# Altium PCB 800U-R3N3-Test.PcbDoc
Units mm, origin at the board's own origin, x right, y up, seen from the top; angles counter-clockwise.
Board outline 152.4 x 101.6 mm, 2 copper layers (Top Layer, Bottom Layer); 98 components, 74 nets, 255 pads, 67 vias.
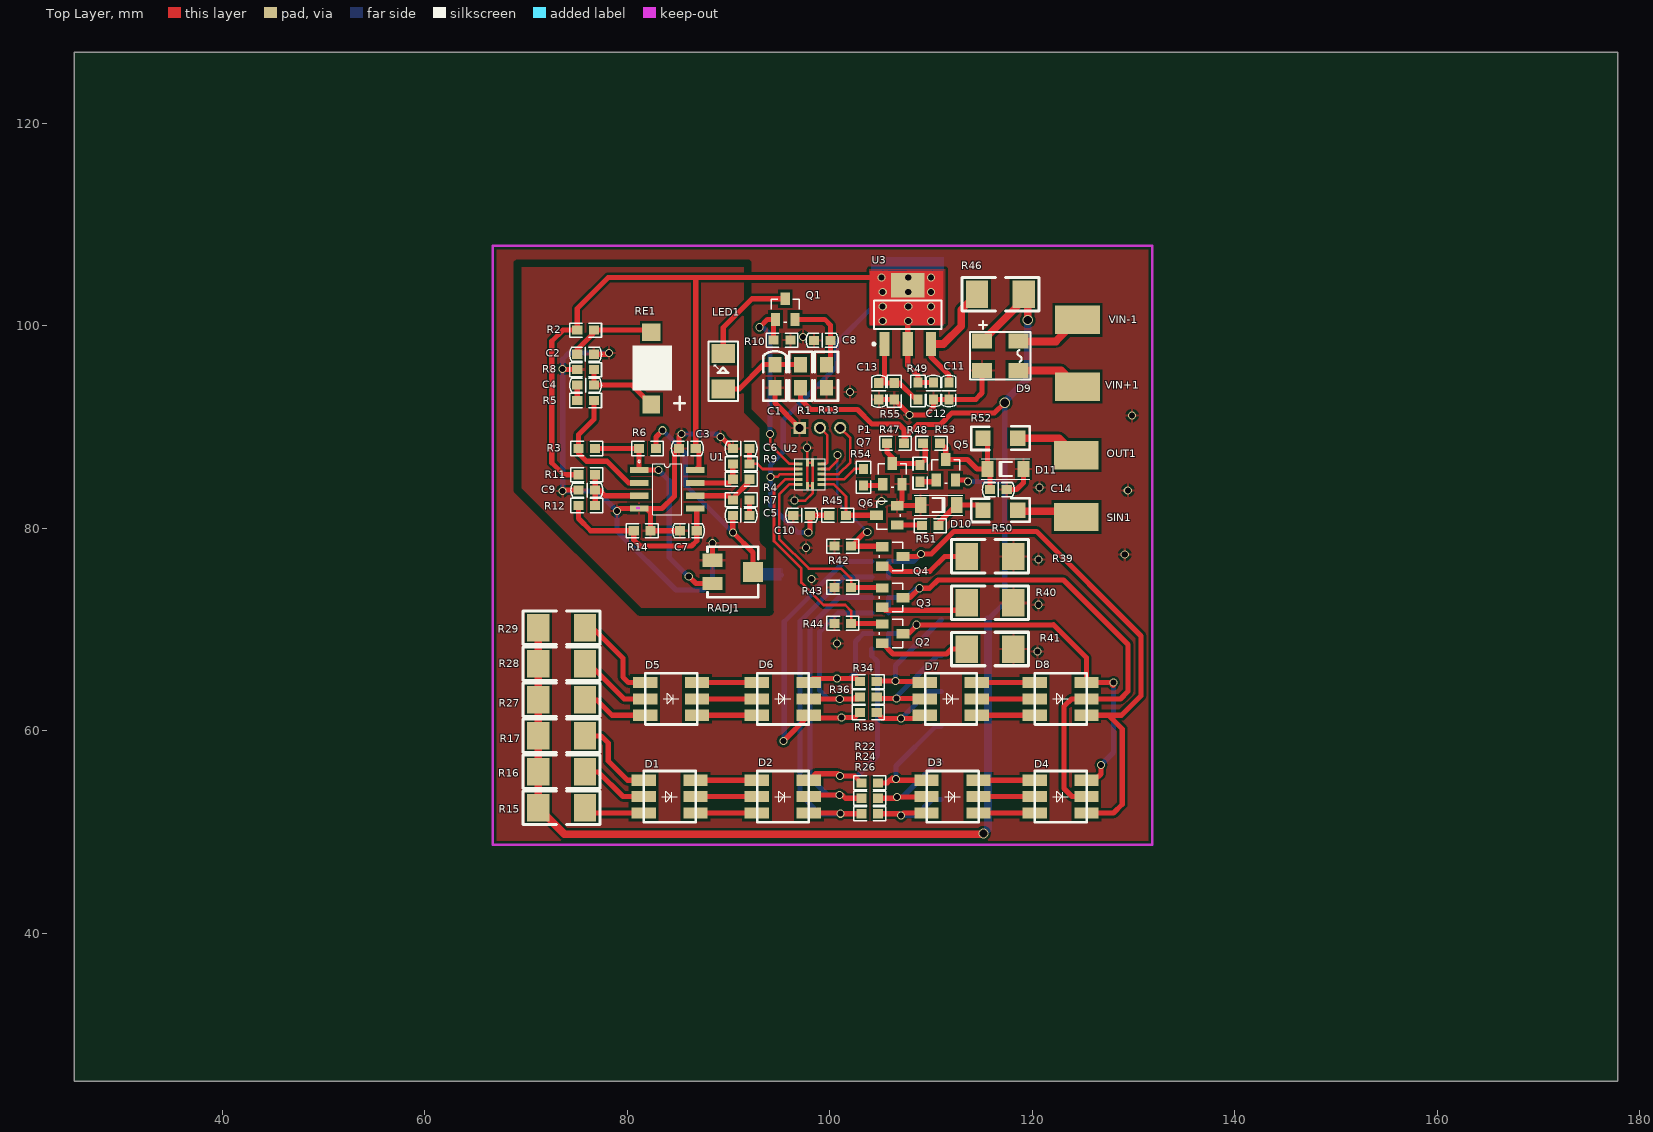
[diagram p0: Top Layer view]
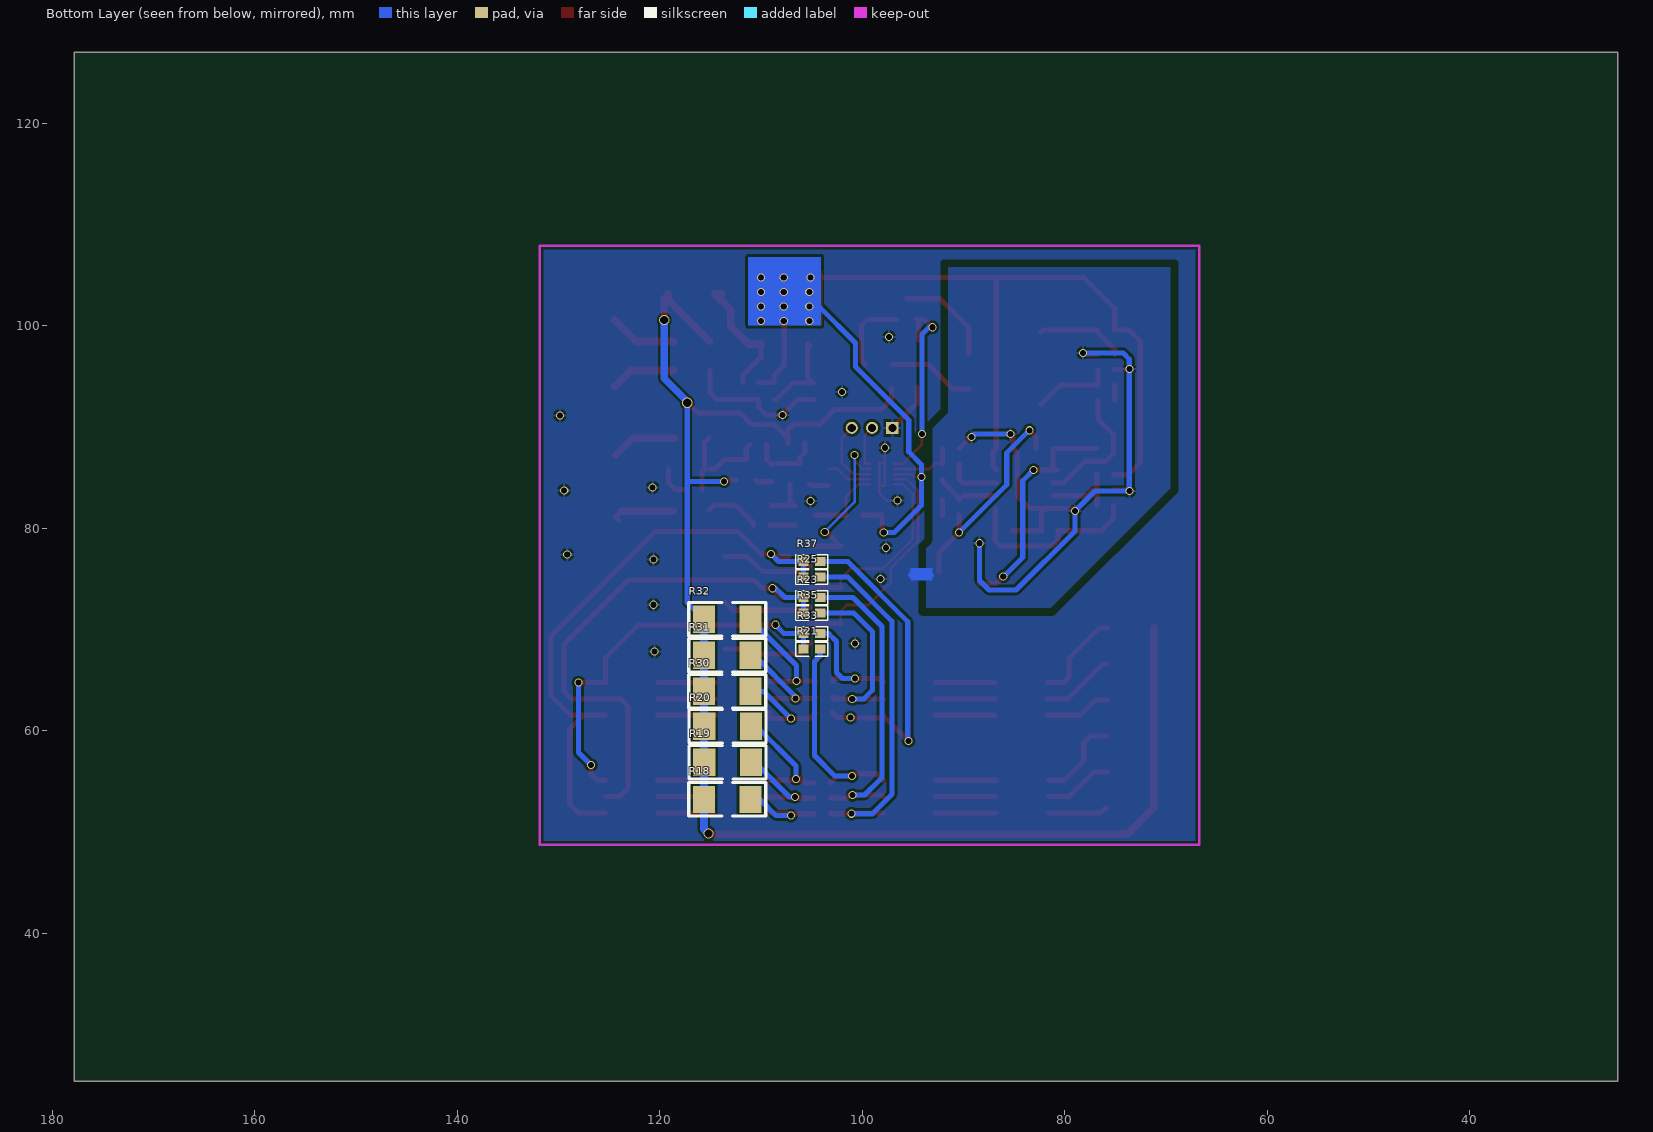
[diagram p1: Bottom Layer view, seen from below]

## Layer stack, top to bottom
Top Layer: signal copper 0.0356
Dielectric: dielectric 0.32, FR-4, Dk 4.8
Bottom Layer: signal copper 0.0356

## Board outline
25.4,25.4 177.8,25.4 177.8,127 25.4,127

## Design rules (kind name [scope] priority, off if disabled: settings)
Clearance [All] p1: gap=0.254
PolygonConnect [All] p1: connectstyle=Relief reliefconductorwidth=0.254 reliefentries=4 polygonreliefangle="90 Angle"
RoutingVias [All] p1: holewidth=0.711 width=1.27 viastyle="Through Hole" minholewidth=0.711 minwidth=1.27 maxholewidth=0.711 maxwidth=1.27
SilkscreenOverComponentPads [All] p1: minsilkscreentomaskgap=0.254
SolderMaskExpansion [All] p1: expansion=0.102
TestPointUsage [All] p1: valid=0 allowmultiple=FALSE
Testpoint [All] p1: side=15 testpointundercomponent=TRUE minsize=1.016 maxsize=2.54 preferedsize=1.524 minholesize=0 maxholesize=1.016 preferedholesize=0.813 testpointgrid=0.025 style=1023 order=0-112345678
Width [All] p1: maxlimit=1.016 minlimit=0.254 preferedwidth=0.254
23 further rules are at their usual default settings.

## Components (designator, comment, footprint, x,y, rotation, side; value= is the part's Value field where it differs from the comment)
C1 "105" C0805 94.584,95.018 r270 top
C2 "C104" C0603 75.057,97.185 r0 top
C3 "C106" C0603 86.765,87.884 r180 top
C4 "C104" C0603 76.707,94.137 r180 top
C5 "C104" C0603 90.424,81.28 r0 top
C6 "C104" C0603 90.424,87.884 r0 top
C7 "C104" C0603 86.868,79.756 r180 top
C8 "C104" C0603 100.076,98.552 r180 top
C9 "C104" C0603 76.834,83.766 r180 top
C10 "C106" C0603 98.044,81.28 r180 top
C11 "Cap" C0603 111.76,94.383 r270 top
C12 "Cap" C0603 110.236,94.383 r270 top
C13 "Cap" C0603 104.838,94.358 r270 top
C14 "C104" C0603 115.824,83.82 r0 top
D1 "5050RGB" 5050RGB 84.183,53.503 r180 top
D2 "5050RGB" 5050RGB 95.359,53.503 r180 top
D3 "5050RGB" 5050RGB 112.123,53.503 r180 top
D4 "5050RGB" 5050RGB 122.791,53.503 r180 top
D5 "5050RGB" 5050RGB 84.328,63.155 r180 top
D6 "5050RGB" 5050RGB 95.359,63.155 r180 top
D7 "5050RGB" 5050RGB 111.947,63.155 r180 top
D8 "5050RGB" 5050RGB 122.791,63.155 r180 top
D9 "LX10M" "桥堆 3.8*3.5" 116.84,97.028 r90 top
D10 "tvs36V" D1206 110.744,82.296 r0 top
D11 "tvs36V" D1206 117.348,85.852 r180 top
LED1 "红光" LED-3.5X2.8 89.483,93.756 r90 top
OUT1 "" HOLE_SMD 124.351,87.212 r0 top
P1 "MHDR1X3" PIN3-2.0mm 97.028,89.916 r90 top
Q1 "MMBT5551 ( NPN)" SOT-23 95.6,101.622 r0 top
Q2 "MMBT5551 ( NPN)" SOT-23 106.172,69.596 r270 top
Q3 "MMBT5551 ( NPN)" SOT-23 106.172,73.152 r270 top
Q4 "MMBT5551 ( NPN)" SOT-23 106.172,77.216 r270 top
Q5 "" SOT-23 111.456,85.741 r0 top
Q6 "MMBT5551 ( NPN)" SOT-23 105.664,81.28 r90 top
Q7 "MMBT5551 ( NPN)" SOT-23 106.172,85.344 r0 top
R1 "" R0805 97.124,95.018 r270 top
R2 "" R0603 76.708,99.568 r180 top
R3 "" R0603 75.184,87.884 r0 top
R4 "" R0603 92.074,84.836 r180 top
R5 "" R0603 75.057,92.613 r0 top
R6 "" R0603 81.177,87.884 r0 top
R7 "" R0603 92.074,82.804 r180 top
R8 "" R0603 75.057,95.661 r0 top
R9 "" R0603 90.424,86.36 r0 top
R10 "" R0603 96.108,98.574 r180 top
R11 "" R0603 75.184,85.29 r0 top
R12 "" R0603 76.834,82.242 r180 top
R13 "" R0805 99.664,95.018 r90 top
R14 "" R0603 82.296,79.756 r180 top
R15 "" 2010 73.52,52.389 r0 top
R16 "" 2010 73.52,55.945 r0 top
R17 "" 2010 73.52,59.501 r0 top
R18 "" 2010 113.328,53.224 r180 bottom
R19 "" 2010 113.284,56.896 r180 bottom
R20 "" 2010 113.284,60.452 r180 bottom
R21 "" R0603 104.14,68.072 r0 bottom
R22 "" R0603 103.124,54.864 r0 top
R23 "" R0603 104.14,73.152 r0 bottom
R24 "" R0603 103.124,53.34 r0 top
R25 "" R0603 104.14,75.184 r0 bottom
R26 "" R0603 103.124,51.816 r0 top
R27 "" 2010 73.52,63.057 r0 top
R28 "" 2010 73.52,66.613 r0 top
R29 "" 2010 73.52,70.169 r0 top
R30 "" 2010 113.328,63.892 r180 bottom
R31 "" 2010 113.328,67.448 r180 bottom
R32 "" 2010 113.328,71.004 r180 bottom
R33 "" R0603 104.14,69.596 r0 bottom
R34 "" R0603 102.981,64.858 r0 top
R35 "" R0603 104.14,71.628 r0 bottom
R36 "" R0603 102.981,63.334 r0 top
R37 "" R0603 104.14,76.708 r0 bottom
R38 "" R0603 102.981,61.81 r0 top
R39 "" 2010 115.824,77.216 r0 top
R40 "" 2010 115.824,72.644 r0 top
R41 "" 2010 115.824,68.072 r0 top
R42 "" R0603 102.108,78.232 r180 top
R43 "" R0603 102.108,74.168 r180 top
R44 "" R0603 102.108,70.612 r180 top
R45 "" R0603 101.6,81.28 r180 top
R46 "" 2010 116.84,103.124 r180 top
R47 "" R0603 105.664,88.392 r0 top
R48 "" R0603 108.916,86.249 r270 top
R49 "" R0603 108.712,92.733 r90 top
R50 "SMD1206P016" 1206 116.84,81.788 r0 top
R51 "" R0603 110.744,80.264 r180 top
R52 "SMD1206P016" 1206 116.84,88.9 r0 top
R53 "" R0603 109.22,88.392 r0 top
R54 "" R0603 103.328,84.217 r90 top
R55 "" R0603 106.362,92.708 r90 top
RADJ1 "20K" POT4MM-2 90.424,75.692 r0 top
RE1 "贴片接收管" LED-1210 82.371,95.788 r0 top
SIN1 "" HOLE_SMD 124.351,81.116 r0 top
U1 "OPA2338" SO-8 81.177,85.755 r90 top
U2 "C8051F300" IC3-3-14P 98.044,85.344 r270 top
U3 "LM317AEMP" MP04A_N 107.696,101.092 r90 top
VIN+1 "" HOLE_SMD 124.46,93.98 r0 top
VIN-1 "" HOLE_SMD 124.46,100.584 r0 top

## Footprints (in the part's own frame and the unit in brackets; to place one, negate y for a bottom-side part, rotate by r counter-clockwise, add the part's x,y. Pads: shape width x height; smd on the part's side, far side on the other; paste and mask are expansions set on the pad)
1206 [mil]
  rect 60x60 smd: 1(-67.5,0) 2(67.5,0)
  silkscreen extent -114,-46 114,46
2010 [mm]
  rect 2.2x2.7 smd: 1(-2.3,0) 2(2.3,0)
  silkscreen extent -3.8,-1.64 3.8,1.66
5050RGB [mm]
  rect 2.4x1.1 smd: 1(-2.565,1.613) 2(-2.565,0) 3(-2.565,-1.613) 4(2.565,-1.613) 5(2.565,0) 6(2.565,1.613)
  silkscreen extent -2.56,-2.53 2.54,2.53
C0603 [mm]
  rect 1x0.9 smd: 1(0,0) 2(1.65,0)
  silkscreen extent -0.75,-0.7 2.4,0.7
C0805 [mil]
  rect 60x50 smd: 1(-45,0) 2(45,0)
  silkscreen extent -98,-45 95,45
D1206 [mil]
  rect 45x62.99 smd: 1(-70,0) 2(70,0)
  silkscreen extent -95,-39 94,39
HOLE_SMD [mm]
  rect 4.4x2.8 smd: 1(0,0)
IC3-3-14P [mil]
  rect 12x30 smd: 1(-40,-45) 2(-20,-45) 3(0,-45) 4(20,-45) 5(40,-45) 6(40,45) 7(20,45) 8(0,45) 9(-20,45) 10(-40,45)
  rect 30x12 smd: 11(-45,-10) 11(-45,10) 11(45,-10) 11(45,10)
  silkscreen extent -60,-60 60,60
LED-3.5X2.8 [mm]
  rect 1.9x2.3 smd: 1(0,0) 2(3.5,0)
  silkscreen extent -1.2,-1.45 4.7,1.45
LED-1210 [mm]
  rect 1.75x1.8 smd: 1(0,-3.575)
  rect 1.8x1.75 smd: 2(0,3.575)
  silkscreen extent -1.87,-4.06 3.3,2.24
MP04A_N [mm]
  rect 2.4x1 smd: 1(-2.9,2.3) 2(-2.9,0) 3(-2.9,-2.3)
  rect 2.4x3.3 smd: 4(2.9,0)
  silkscreen extent -3.02,-3.35 1.4,3.47, body extent -1.85,-3.35 1.85,3.35, height 1.8
PIN3-2.0mm [mm]
  rect 1.2x1.2 hole 0.8: 1(0,0)
  round 1.2 hole 0.8: 2(0,-2) 3(0,-4)
POT4MM-2 [mm] "Square Trimming Potentiometer"
  rect 2x1.3 smd: CCW(-2,-1.15) CW(-2,1.15)
  rect 2x2 smd: W(2,0)
  silkscreen extent -2.5,-2.5 2.5,2.5
R0603 [mm]
  rect 1x0.9 smd: 1(0,0) 2(1.65,0)
  silkscreen extent -0.75,-0.7 2.4,0.7
R0805 [mil]
  rect 60x50 smd: 1(-45,0) 2(45,0)
  silkscreen extent -95,-45 95,45
SO-8 [mm]
  rect 0.6x1.85 smd: 1(0,0) 2(-1.27,0) 3(-2.54,0) 4(-3.81,0) 5(-3.81,-5.55) 6(-2.54,-5.55) 7(-1.27,-5.55) 8(0,-5.55)
  silkscreen extent -4.41,-4.23 0.97,0.12
SOT-23 [mil]
  rect 36x50 smd: 1(-37.5,-39) 2(37.5,-39) 3(0,41)
  silkscreen extent -55,-50 55,40
"桥堆 3.8*3.5" [mm]
  rect 1.5x2 smd: 1(1.45,1.8) 2(1.45,-1.8) 3(-1.45,-1.8) 4(-1.45,1.8)
  silkscreen extent -2.35,-3 3.45,3

## Part data
C1 C2 C3 C4 C5 C6 C7 C8 C9 C10 C14: library part Cap, "Capacitor"
C11 C12 C13: "Capacitor"
D1 D2 D3 D4 D5 D6 D7 D8: "RBG发光管"
D9: library part Bridge2, "Diode Bridge"
D10 D11: library part "D Schottky", "Schottky Diode"
LED1: library part LED0, "Typical INFRARED GaAs LED"
OUT1 SIN1 VIN+1 VIN-1: library part HOLE
P1: "Header, 3-Pin"
Q1 Q2 Q3 Q4 Q6 Q7: library part NPN, "NPN三极管"
Q5: library part S8550
R1 R2 R3 R4 R5 R6 R7 R8 R9 R10 R11 R12 R13 R14 R15 R16 R17 R18 R19 R20 R21 R22 R23 R24 R25 R26 R27 R28 R29 R30 R31 R32 R33 R34 R35 R36 R37 R38 R39 R40 R41 R42 R43 R44 R45 R46 R47 R48 R49 R51 R53 R54 R55: library part "Res Semi", "Semiconductor Resistor"
R50 R52: library part Res2, "Resistor"
RADJ1: library part "RPot SM", "Square Trimming Potentiometer"
RE1: library part "Photo Sen", "Photosensitive Diode"
U1: library part LM833D, "Dual Low Noise, Audio Amplifier"
U2: library part PIC16C505
U3: "3-Terminal Adjustable Regulator"

## Via types
v1: diameter 0.8, hole 0.6, Top Layer to Bottom Layer, 64 vias
v2: diameter 1, hole 0.8, Top Layer to Bottom Layer, 3 vias

## Nets (pads, with @x,y where several pads share a name; then routed paths per layer and width w, separated by ;. In a path a pad name is that pad's centre, name@x,y a point inside that pad or via, vN(x,y) a via of type N, cw(c..) or ccw(c..) an arc to the next point about the centre after c; other vN are vias at no path point)
3.3V: C3.1 C10.1 C12.1 R2.2 R11.1 R45.2 R49.2 U1.8 U2.3 U3.2 U3.4 | length 135.8
  Top Layer w0.254: v1(94.132,85.075) 94.831,85.075 95.1,85.344 U2.3
  Top Layer w0.508: R11.1 73.735,85.29 72.55,86.475 72.55,98.475 73.643,99.568 R2.2 75.058,101.708 78.124,104.774 86.775,104.774 ; U1.8 87.1,86.128 87.1,87.549 C3.1 86.765,104.764 86.775,104.774 ; v1(97.875,79.6) 98.044,79.769 C10.1 R45.2 ; v1(105.225,100.45) v1(105.225,101.883) ; v1(105.225,103.317) v1(105.225,101.883) ; v1@105.225,104.674 v1(105.125,104.774) ; U3.4@107.609,104.275 U3.4@107.892,103.992 ; 107.696,96.579 U3.2 ; v1@107.696,100.654 U3.2 ; v1(107.746,100.45) v1(107.746,101.883) ; v1(110,100.45) v1(110,101.883) ; v1(110,104.774) v1(110,103.317) v1(110,101.883) ; C12.1 R49.2 108.712,95.088 107.696,96.104 U3.2 ; 86.775,104.774 v1(105.125,104.774) ; v1(105.125,104.774) 106.914,104.774 U3.4 107.746,103.942 v1(107.746,101.883) ; v1(105.225,101.883) v1(107.746,101.883) ; v1(107.746,101.883) v1(110,101.883)
  Bottom Layer w0.508: v1(97.875,79.6) 96.8,79.6 94.132,82.268 v1(94.132,85.075) 94.132,86.282 95.4,87.55 95.4,90.7 100.65,95.95 100.65,98.3 104.233,101.883 v1(105.225,101.883)
  other v1: 107.746,103.317 107.746,104.774
+24V: D9.1 Q5.2 R1.2 R15.1 R16.1 R17.1 R18.1 R19.1 R20.1 R27.1 R28.1 R29.1 R30.1 R31.1 R32.1 R46.1 R47.2 | length 176.4
  Top Layer w0.508: R1.2 97.124,92.726 98.125,91.725 102.725,91.725 104.15,90.3 106.775,90.3 107.314,89.761 107.314,88.889 ; R47.2 107.314,88.889 ; Q5.2 113.509,84.75 v1(113.656,84.604) ; v2(117.275,92.4) 116.275,91.4 112.075,91.4 110.925,90.25 108.675,90.25 107.314,88.889 ; R46.1 R46.1@119.55,102.714 ; R17.1 R16.1 R17.1 ; R17.1 R27.1 ; R17.1 R27.1 ; R27.1 R28.1 R27.1
  Top Layer w0.706: v2(119.55,100.55) R46.1@119.55,102.714
  Top Layer w0.762: R29.1 R28.1 R27.1 R17.1 R16.1 R15.1 73.809,49.8 115.1,49.8 v2(115.175,49.875) ; D9.1 119.14,102.578 R46.1
  Bottom Layer w0.508: v1@113.946,84.604 v1(113.656,84.604) 117.179,84.604 117.275,84.7 ; R32.1 117.275,72.651 117.275,84.7 ; v2@117.275,92.525 v2(117.275,92.4) 117.275,84.7
  Bottom Layer w0.706: v2@117.275,92.525 119.55,94.8 v2(119.55,100.55)
  Bottom Layer w0.762: v2(115.175,49.875) 115.2,49.875 115.628,50.303 R18.1 115.628,60.452 R30.1 R31.1 R32.1
ADCIN: R4.2 R9.1 U1.7 | length 5.4
  Top Layer w0.508: U1.7 90.073,84.485 R4.2 R9.1
ADCIN1: C6.2 R9.2 U2.2 | length 6.6
  Top Layer w0.254: R9.2 92.865,86.36 93.373,85.852 U2.2
  Top Layer w0.508: R9.2 C6.2
GND: C1.2 C2.2 C3.2 C6.1 C7.2 C8.2 C9.2 C10.2 C11.2 C12.2 C13.2 C14.2 D9.4 D10.1 D11.1 P1.1 Q6.2 Q7.2 R8.1 R10.1 R13.1 R14.1 R39.2 R40.2 R41.2 R42.2 R43.2 R44.2 R55.1 RADJ1.CW U1.4 U2.11 | length 111.8
  Top Layer w0.254: v1(96.5,82.725) 97.575,82.725 98.298,83.448 U2.11@98.298,84.201 ; v1@97.79,87.965 U2.11@97.79,86.487 ; U2.11@97.79,86.487 97.79,84.201 U2.11@98.298,84.201 ; U2.11@97.79,86.487 98.298,86.487 U2.11@98.298,84.201
  Top Layer w0.508: v1(73.625,83.675) 73.716,83.766 C9.2 ; v1@73.786,95.661 R8.1 ; C2.2 78.06,97.185 v1(78.2,97.325) ; v1(79,81.7) 79.245,81.945 U1.4 ; C7.2 R14.1 82.296,81.554 81.905,81.945 U1.4 ; v1(85.375,89.3) 85.115,89.04 C3.2 84.65,87.419 84.65,83.15 83.445,81.945 U1.4 ; RADJ1.CW v1(88.424,78.524) ; v1(89.2,89.025) 89.283,89.025 C6.1 ; C1.2 94.584,92.36 P1.1 ; C13.2 R55.1 v1(107.87,91.2) 109.475,91.2 110.236,91.961 C12.2 C11.2 114.408,92.733 115.04,93.365 D9.4 ; Q7.2 107.124,82.702 Q6.2 108.902,82.233 D10.1 ; C14.2 118.445,83.82 119.126,84.501 D11.1
  Bottom Layer w0.508: v1@73.675,95.775 v1(73.625,95.725) ; v1(78.2,97.325) 74.25,97.325 73.625,96.7 v1(73.625,95.725) ; v1(85.375,89.3) 88.925,89.3 v1(89.2,89.025) ; v1(88.424,78.524) 88.424,74.849 87.475,73.9 84.8,73.9 79,79.7 v1(79,81.7) 77.025,83.675 v1(73.625,83.675) v1(73.625,95.725) ; 93.2,75.325 93.175,75.35 93.2,75.375 95.225,75.375
  other v1: 120.5,67.825 100.725,68.625 120.6,72.45 98.2,75 120.625,76.925 129.125,77.4 97.65,78.075 105.1,82.675 129.425,83.75 120.7,84.025 97.75,87.95 129.85,91.125 102,93.475 97.35,98.9
INPUT: Q6.3 R45.1 U2.6 | length 7.8
  Top Layer w0.254: U2.6 100.397,84.328 101.6,83.125 R45.1
  Top Layer w0.508: R45.1 Q6.3
LED_B: Q2.1 R44.1 U2.4 | length 23.5
  Top Layer w0.254: U2.4 95.586,84.836 94.492,83.742 94.492,78.74 97.2,76.032 97.2,74.625 99.4,72.425 101.525,72.425 102.108,71.842 R44.1
  Top Layer w0.508: R44.1 105.118,70.612 Q2.1
LED_G: Q3.1 R43.1 U2.5 | length 19.3
  Top Layer w0.254: U2.5 95.978,84.328 95,83.35 95,78.95 97.925,76.025 101.125,76.025 102.108,75.042 R43.1
  Top Layer w0.508: R43.1 Q3.1@105.118,74.168
LED_R: Q4.1 R42.1 U2.9 | length 16.5
  Top Layer w0.254: U2.9 99.927,85.852 100.75,86.675 v1(100.75,87.225)
  Top Layer w0.508: v1(103.7,79.625) 103.501,79.625 R42.1 Q4.1@105.118,78.232
  Bottom Layer w0.254: v1(100.75,87.225) 100.75,82.575 v1(103.7,79.625)
LEDCTL: Q1.1 R10.2 U2.1 | length 19.8
  Top Layer w0.254: v1(94.1,89.325) 94.1,88.275 96.015,86.36 U2.1
  Top Layer w0.508: v1(93.075,99.85) 93.856,100.631 Q1.1 94.458,100.442 R10.2
  Bottom Layer w0.508: v1(93.075,99.85) 93.4,99.85 94.1,99.15 v1(94.1,89.325)
NetC1_1: C1.1 LED1.1 R1.1 | length 8.6
  Top Layer w0.508: LED1.1 91.056,93.756 93.461,96.161 R1.1
NetC2_1: C2.1 R2.1 RE1.2 | length 8.8
  Top Layer w0.508: C2.1 75.057,97.657 76.708,99.308 R2.1 82.166,99.568 RE1.2
NetC4_1: C4.1 R8.2 RE1.1 | length 8
  Top Layer w0.508: R8.2 C4.1 80.447,94.137 RE1.1
NetC4_2: C4.2 R5.1 | length 1.5
  Top Layer w0.508: R5.1 C4.2
NetC5_1: C5.1 R6.2 RADJ1.W | length 21.4
  Top Layer w0.508: R6.2 82.827,89.002 v1(83.5,89.675) ; C5.1 v1(90.424,79.6) 92.424,77.6 RADJ1.W
  Bottom Layer w0.508: v1(83.5,89.675) 85.725,87.45 85.725,84.299 v1(90.424,79.6)
NetC5_2: C5.2 R7.1 | length 1.5
  Top Layer w0.508: C5.2 R7.1
NetC7_1: C7.1 R12.2 R14.2 U1.5 | length 18.1
  Top Layer w0.508: R12.2 75.184,80.966 76.394,79.756 R14.2 80.646,78.854 81.25,78.25 86.35,78.25 86.868,78.768 86.868,81.804 U1.5
NetC8_1: C8.1 Q1.2 R13.2 | length 7.8
  Top Layer w0.508: Q1.2 99.494,100.631 100.076,100.049 100.076,96.573 R13.2
NetC9_1: C9.1 R11.2 R12.1 U1.3 | length 7.6
  Top Layer w0.508: R12.1 C9.1 ; R11.2 C9.1 ; U1.3 77.81,83.215 77.259,83.766 C9.1
NetC11_1: C11.1 R46.2 U3.3 | length 12.7
  Top Layer w0.508: U3.3 109.996,96.904 111.76,95.14 C11.1
  Top Layer w0.762: U3.3 111.217,98.192 112.975,99.95 112.975,101.559 R46.2 R46.2@113.874,103.124
NetC13_1: C13.1 R49.1 R55.2 U3.1 | length 8.9
  Top Layer w0.508: U3.1@105.163,97.959 U3.1 105.396,94.916 C13.1 R55.2 106.867,94.358 108.492,92.733 R49.1
NetC14_1: C14.1 D11.2 Q5.3 R52.1 R53.2 | length 11
  Top Layer w0.508: R53.2@111.074,88.281 111.456,87.899 Q5.3 113.593,86.782 114.523,85.852 D11.2@115.062,85.852 ; R52.1 115.57,88.456 D11.2 115.824,85.598 C14.1
NetD1_1: D1.1 D2.6 | length 6
  Top Layer w0.508: D1.1 D2.6
NetD1_2: D1.2 D2.5 | length 6
  Top Layer w0.508: D1.2 D2.5
NetD1_3: D1.3 D2.4 | length 6
  Top Layer w0.508: D1.3 D2.4
NetD1_4: D1.4 R17.2 | length 8.7
  Top Layer w0.508: R17.2 77.424,59.501 78.125,58.8 78.125,57.025 80.034,55.116 D1.4
NetD1_5: D1.5 R16.2 | length 6.8
  Top Layer w0.508: R16.2 77.13,55.945 79.572,53.503 D1.5
NetD1_6: D1.6 R15.2 | length 6
  Top Layer w0.508: R15.2 76.011,52.389 76.51,51.89 D1.6
NetD2_1: D2.1 R25.1 R26.1 | length 36.1
  Top Layer w0.508: D2.1 101.05,51.89 101.066,51.874 v1(101.066,51.816) 102.976,51.816 103.05,51.89 R26.1
  Bottom Layer w0.508: v1(101.066,51.816) 98.984,51.816 97.075,53.725 97.075,70.825 101.434,75.184 R25.1
NetD2_2: D2.2 R23.1 R24.1 | length 32.3
  Top Layer w0.508: D2.2@97.996,53.575 D2.2 98.074,53.653 v1(100.955,53.653) 101.222,53.653 101.535,53.34 102.798,53.34 102.961,53.503 R24.1
  Bottom Layer w0.508: 100.053,53.653 v1(100.955,53.653) 99.772,53.653 98.05,55.375 98.05,70.3 100.902,73.152 R23.1
NetD2_3: D2.3 R21.1 R22.1 | length 21.1
  Top Layer w0.508: D2.3 98.575,55.767 100.783,55.767 v1(101.025,55.525) 102.463,55.525 R22.1
  Bottom Layer w0.508: v1(101.025,55.525) 102.675,55.525 104.7,57.55 104.7,66.85 104.14,67.41 R21.1
NetD3_1: D3.1 D4.6 | length 5.5
  Top Layer w0.508: D3.1 D4.6
NetD3_2: D3.2 D4.5 | length 5.5
  Top Layer w0.508: D3.2 D4.5
NetD3_3: D3.3 D4.4 | length 5.5
  Top Layer w0.508: D3.3 D4.4
NetD3_4: D3.4 R20.2 R22.2 | length 12.6
  Top Layer w0.508: R22.2 105.673,54.864 105.924,55.116 ; v1@106.163,55.354 105.924,55.116 ; D3.4 105.924,55.116
  Bottom Layer w0.508: v1(106.525,55.25) 106.525,56.525 110.452,60.452 R20.2
NetD3_5: D3.5 R19.2 R24.2 | length 10.7
  Top Layer w0.508: R24.2 106.65,53.34 v1(106.65,53.475) 109.53,53.475 D3.5
  Bottom Layer w0.508: v1(106.65,53.475) 107.175,53.475 110.596,56.896 R19.2
NetD3_6: D3.6 R18.2 R26.2 | length 9.8
  Top Layer w0.508: R26.2 106.759,51.816 106.95,51.625 v1(107.034,51.625) 107.299,51.89 D3.6 D3.6@109.483,51.816
  Bottom Layer w0.508: v1@106.95,51.625 108.5,51.625 110.099,53.224 R18.2
NetD4_1: D4.1 D8.1 Q4.3 R25.2 R37.2 | length 59.2
  Top Layer w0.508: Q4.3 108.666,77.216 108.975,77.525 v1(109.025,77.475) 110.05,77.475 112.25,79.675 120.425,79.675 130.737,69.363 130.737,63.462 128.817,61.542 127.508,61.542 ; D4.1 128.015,51.89 128.875,52.75 128.875,60.175 127.508,61.542 ; D8.1 127.508,61.542
  Bottom Layer w0.508: R25.2 R37.2 108.258,76.708 v1(109.025,77.475)
NetD4_2: D4.2 D8.2 Q3.3 R23.2 R35.2 | length 52.8
  Top Layer w0.508: Q3.3 107.927,73.152 v1(108.85,74.075) 109.85,74.075 110.675,74.9 123.075,74.9 129.45,68.525 129.45,63.9 128.705,63.155 D8.2 123.855,63.155 123.125,62.425 123.125,54.3 123.922,53.503 D4.2
  Bottom Layer w0.508: R35.2 R23.2 107.627,73.152 108.55,74.075 v1(108.85,74.075)
NetD4_3: D4.3 D8.3 Q2.3 R21.2 R33.2 | length 41
  Top Layer w0.508: Q2.3 107.771,69.596 108.65,70.475 v1(108.575,70.475) ; v1@108.65,70.45 122.1,70.45 ; 122.1,70.475 125.356,67.219 D8.3 127.682,64.768 127.975,64.475 v1@128,64.475 ; D4.3 126.141,55.116 126.775,55.75 v1(126.775,56.625)
  Bottom Layer w0.508: R21.2 R33.2 107.696,69.596 v1(108.575,70.475) ; v1(126.775,56.625) 128,57.85 v1(128,64.775)
NetD5_1: D5.1 D6.6 | length 5.9
  Top Layer w0.508: D5.1 D6.6
NetD5_2: D5.2 D6.5 | length 5.9
  Top Layer w0.508: D5.2 D6.5
NetD5_3: D5.3 D6.4 | length 5.9
  Top Layer w0.508: D5.3 D6.4
NetD5_4: D5.4 R29.2 | length 9.3
  Top Layer w0.508: R29.2 76.581,70.169 79.575,67.175 79.575,65.3 80.107,64.768 D5.4
NetD5_5: D5.5 R28.2 | length 7.4
  Top Layer w0.508: R28.2 76.237,66.613 79.695,63.155 D5.5
NetD5_6: D5.6 R27.2 | length 6.6
  Top Layer w0.508: R27.2 76.993,63.057 78.508,61.542 D5.6
NetD6_1: D6.1 R37.1 R38.1 | length 31.9
  Top Layer w0.508: v1(95.425,59) 97.924,61.499 D6.1 98.191,61.275 101.15,61.275 v1(101.175,61.3) 102.471,61.3 R38.1
  Bottom Layer w0.508: v1(95.425,59) 95.5,59.075 95.5,70.775 101.433,76.708 R37.1
NetD6_2: D6.2 R35.1 R36.1 | length 19.4
  Top Layer w0.508: D6.2 v1(100.98,63.155) 102.802,63.155 R36.1 ; 102.41,63.155 R36.1@102.589,63.334
  Bottom Layer w0.508: v1(100.98,63.155) 99.85,63.155 99,64.005 99,69.8 100.828,71.628 R35.1
NetD6_3: D6.3 R33.1 R34.1 | length 12.5
  Top Layer w0.508: D6.3 98.332,65.175 v1(100.725,65.175) ; v1@100.7,65.2 100.75,65.2 v1(100.725,65.175) ; R34.1 102.664,65.175 v1(100.725,65.175)
  Bottom Layer w0.508: v1(100.725,65.175) 101.95,65.175 102.525,65.75 102.525,68.825 103.296,69.596 R33.1
NetD7_1: D7.1 D8.6 | length 5.7
  Top Layer w0.508: D7.1 D8.6
NetD7_2: D7.2 D8.5 | length 5.7
  Top Layer w0.508: D7.2 D8.5
NetD7_3: D7.3 D8.4 | length 5.7
  Top Layer w0.508: D7.3 D8.4
NetD7_4: D7.4 R32.2 R34.2 | length 12.7
  Top Layer w0.508: R34.2 104.676,64.903 v1(106.48,64.903) ; v1@106.48,64.858 D7.4@109.291,64.858
  Bottom Layer w0.508: v1(106.48,64.903) 106.48,66.456 R32.2
NetD7_5: D7.5 R31.2 R36.2 | length 11.1
  Top Layer w0.508: R36.2 104.765,63.2 v1(106.575,63.2) 109.069,63.2 109.203,63.334 D7.5
  Bottom Layer w0.508: v1@106.575,63.375 110.648,67.448 R31.2
NetD7_6: D7.6 R30.2 R38.2 | length 10.6
  Top Layer w0.508: R38.2 105.216,61.225 v1(107.05,61.225) 109.065,61.225 D7.6 D7.6@109.114,61.81
  Bottom Layer w0.508: v1(107.05,61.225) 109.717,63.892 R30.2
NetD9_2: D9.2 VIN-1.1 | length 6.7
  Top Layer w0.762: D9.2 118.668,98.45 122.326,98.45 VIN-1.1
NetD9_3: D9.3 VIN+1.1 | length 6.5
  Top Layer w0.762: D9.3 122.862,95.578 VIN+1.1
NetD10_2: D10.2 R50.1 R51.1 | length 5.6
  Top Layer w0.508: R51.1 110.744,80.518 D10.2 114.617,82.296 R50.1
NetLED1_2: LED1.2 Q1.3 | length 9.9
  Top Layer w0.508: LED1.2 89.483,99.833 92.313,102.663 Q1.3
NetP1_2: P1.2 U2.10 | length 4.4
  Top Layer w0.254: P1.2 99.75,89.194 99.75,86.475 99.635,86.36 U2.10
NetP1_3: P1.3 U2.8 | length 7.1
  Top Layer w0.254: U2.8 100.869,85.344 102.025,86.5 102.025,88.919 P1.3
NetQ2_2: Q2.2 R41.1 | length 9
  Top Layer w0.508: Q2.2 106.25,67.575 111.525,67.575 112.022,68.072 R41.1
NetQ3_2: Q3.2 R40.1 | length 8.8
  Top Layer w0.508: Q3.2 105.481,71.9 112.78,71.9 R40.1
NetQ4_2: Q4.2 R39.1 | length 9.2
  Top Layer w0.508: Q4.2 105.712,76.263 106.225,75.75 109.875,75.75 111.341,77.216 R39.1
NetQ5_1: Q5.1 R48.2 | length 1.7
  Top Layer w0.508: R48.2 110.352,84.599 Q5.1
NetQ6_1: Q6.1 R51.2 | length 2.5
  Top Layer w0.508: Q6.1 109.031,80.328 R51.2
NetQ7_1: Q7.1 R54.1 | length 1.9
  Top Layer w0.508: R54.1 105.083,84.217 Q7.1
NetQ7_3: Q7.3 R47.1 R48.1 R53.1 | length 7.1
  Top Layer w0.508: R47.1 105.664,87.486 106.172,86.978 Q7.3 R48.1@108.78,86.385 ; R48.1 109.424,86.757 R53.1@109.424,88.281
NetR3_1: R3.1 R5.2 U1.2 | length 13
  Top Layer w0.508: R5.2 76.707,90.757 75.184,89.234 75.184,87.416 75.975,86.625 78,86.625 80.14,84.485 U1.2
NetR3_2: R3.2 R6.1 RADJ1.CCW U1.1 | length 23.3
  Top Layer w0.508: R3.2 R6.1 U1.1 ; U1.1@80.72,85.755 U1.1 ; v1(83.095,85.755) U1.1 ; v1(86.075,75.25) 86.783,74.542 RADJ1.CCW
  Bottom Layer w0.508: v1(83.095,85.755) 84.15,84.7 84.15,77.125 86.025,75.25 v1(86.075,75.25)
NetR4_1: R4.1 R7.2 U1.6 | length 6.6
  Top Layer w0.508: U1.6 90.013,83.215 R7.2 90.424,82.974 92.074,84.624 R4.1
OUT: OUT1.1 R52.2 | length 6.5
  Top Layer w0.72: 122.663,88.9 OUT1.1
  Top Layer w0.762: R52.2 122.663,88.9
OUTPUT: R54.2 U2.7 | length 4.6
  Top Layer w0.254: U2.7 101.386,84.836 102.417,85.867 R54.2
SIN: R50.2 SIN1.1 | length 6.6
  Top Layer w0.508: R50.2 R50.2@118.667,81.675 ; SIN1.1@123.792,81.675 SIN1.1 SIN1.1@124.007,80.772
  Top Layer w0.762: R50.2@118.667,81.675 SIN1.1@123.792,81.675

## Polygon pours and split planes (outlines as drawn)
GND on Top Layer "Top Layer-No Net" (solid): 66.725,107.625 66.725,48.75 131.55,48.75 131.85,49.05 131.85,107.7 66.925,107.7 66.725,107.9
3.3V on Top Layer "Top Layer-No Net" (solid): 103.525,105.962 103.525,100.025 111.45,100.025 111.675,99.8 111.775,99.9 111.775,105.975 103.538,105.975 103.525,105.962
GND on Bottom Layer "Top Layer-No Net" (solid): 66.725,107.625 66.725,48.75 131.7,48.75 131.7,107.75 131.85,107.9

## Keep-outs
Top Layer:
  lines w0.254: 80.975,82 81.122,82
Keep-Out Layer:
  lines w0.254: 66.725,48.75 131.85,48.75 131.85,107.9 66.725,107.9 66.725,48.75

## Other copper
Top Layer:
  rectangle net 3.3V: 103.913,100.025 111.25,105.417
Bottom Layer:
  rectangle net GND: 93.05,74.85 95.225,76.075
  rectangle net GND: 95.325,75.1 95.375,76.025
  rectangle net 3.3V: 104.05,100 111.275,106.8